# Altium PCB board_32.PcbDoc
Units mil, origin at the board's own origin, x right, y up, seen from the top; angles counter-clockwise.
Board outline 3248.03 x 3149.61 mil, 2 copper layers (Top Layer, Bottom Layer); 42 components, 39 nets, 152 pads, 6 vias.
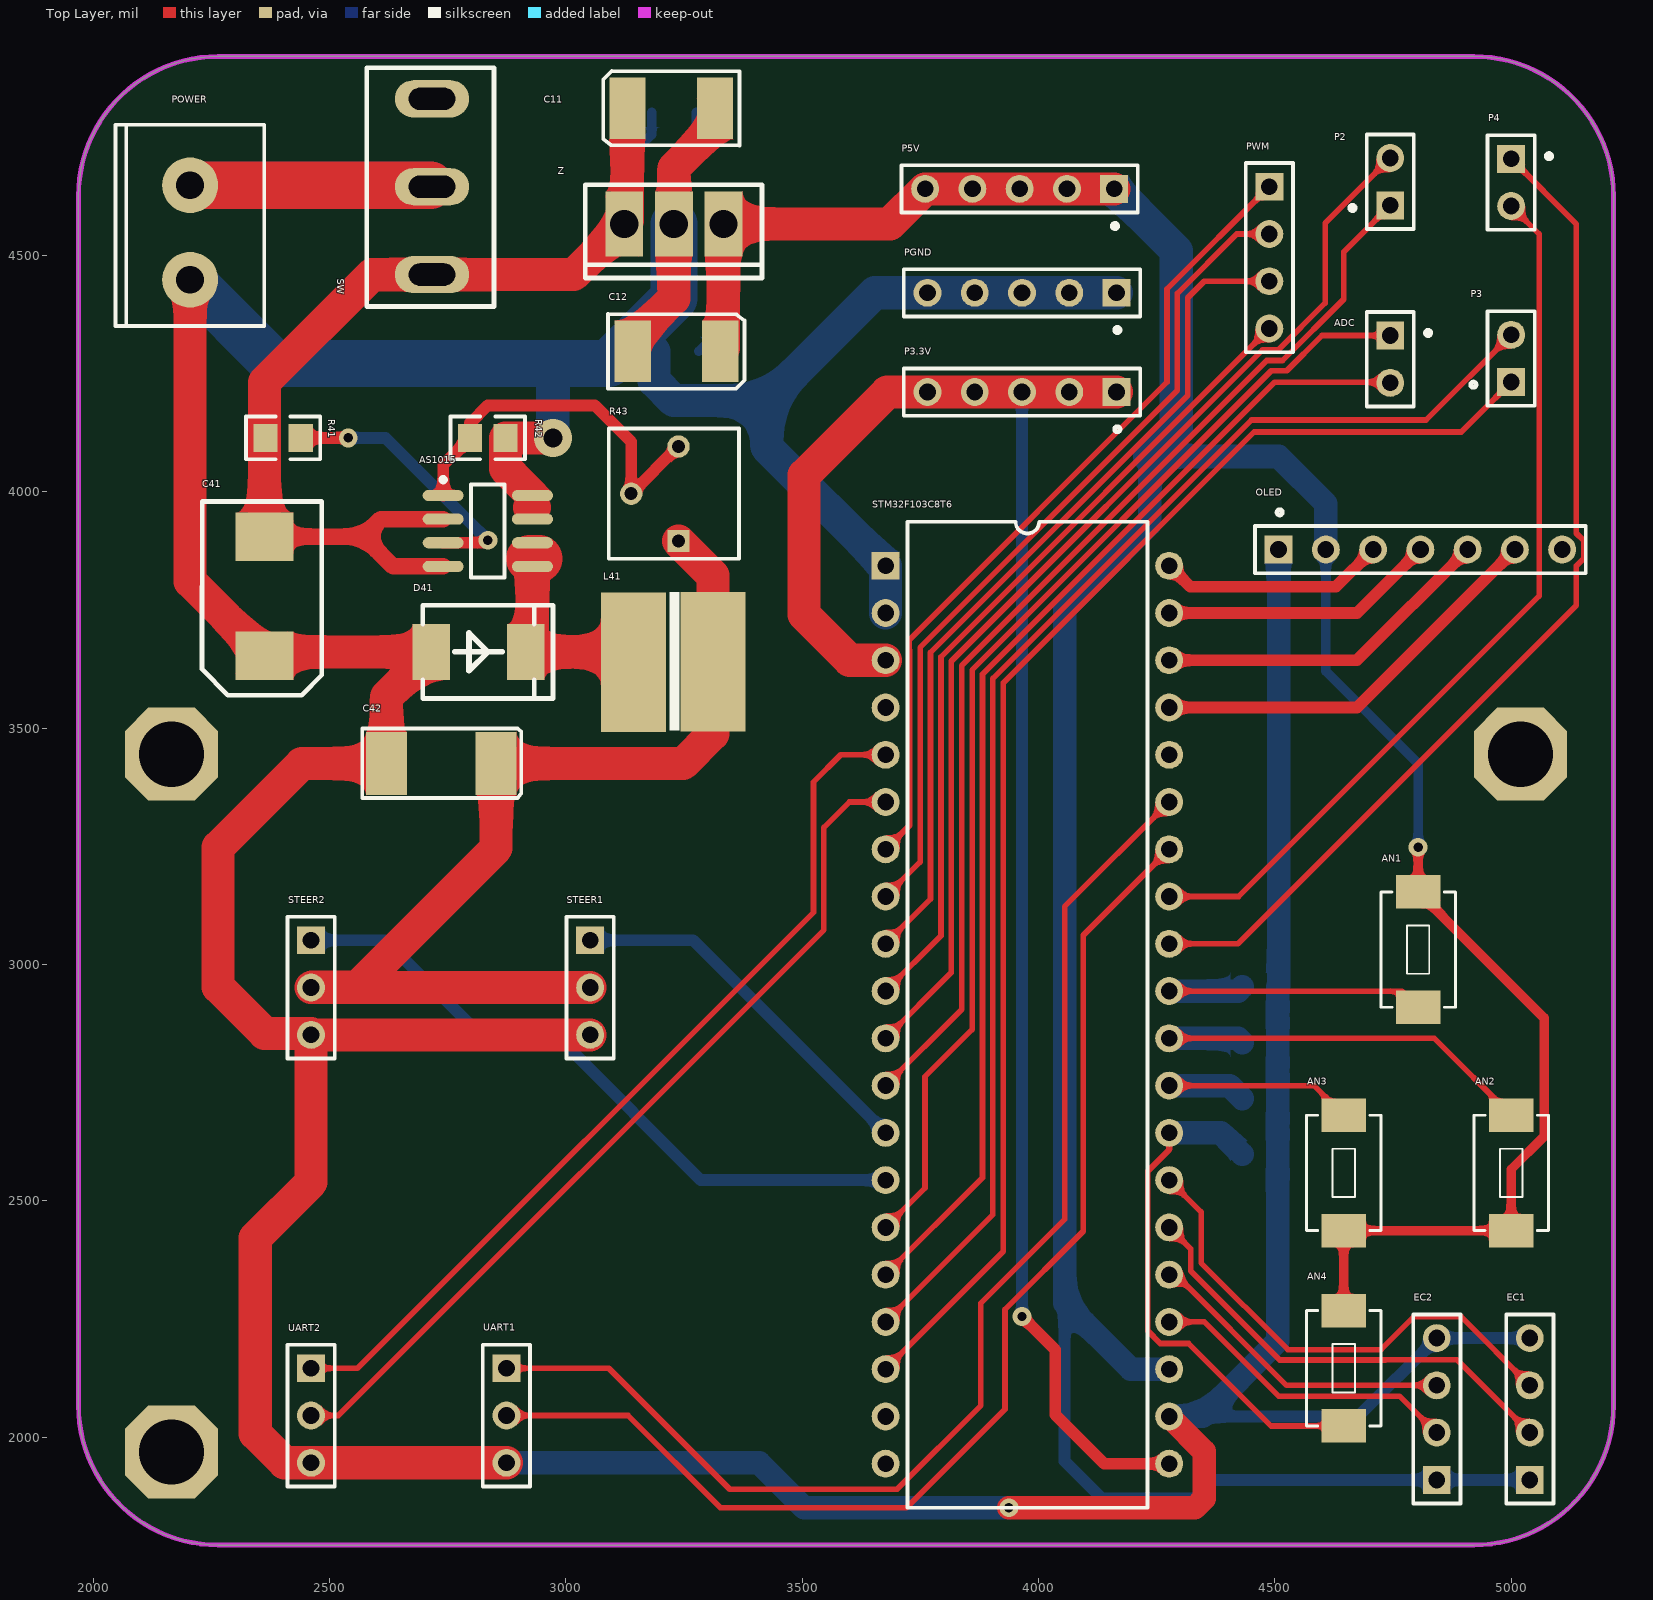
[diagram p0: Top Layer view]
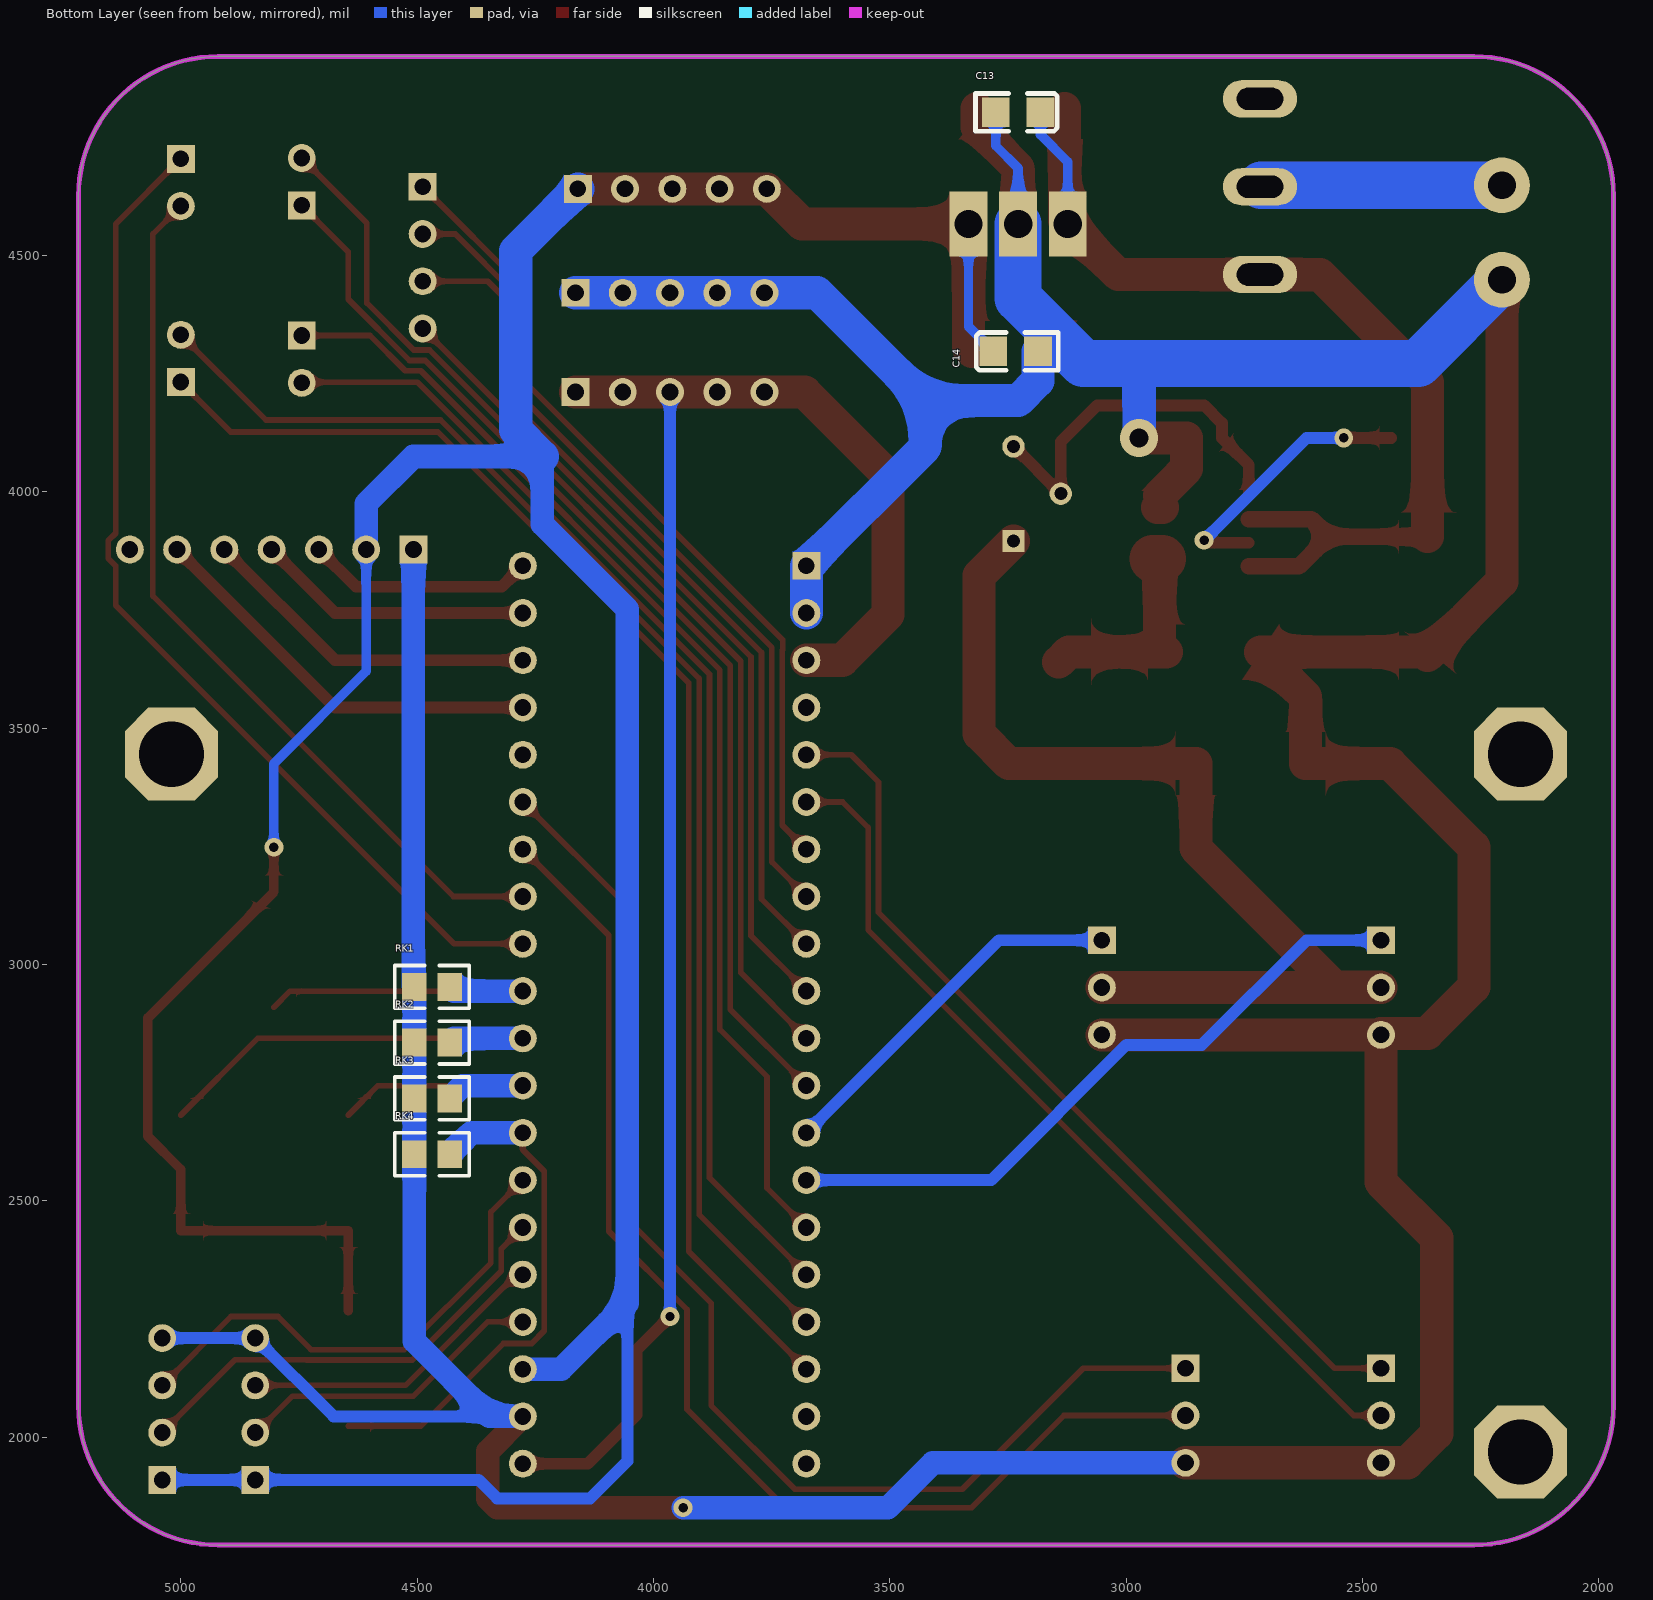
[diagram p1: Bottom Layer view, seen from below]
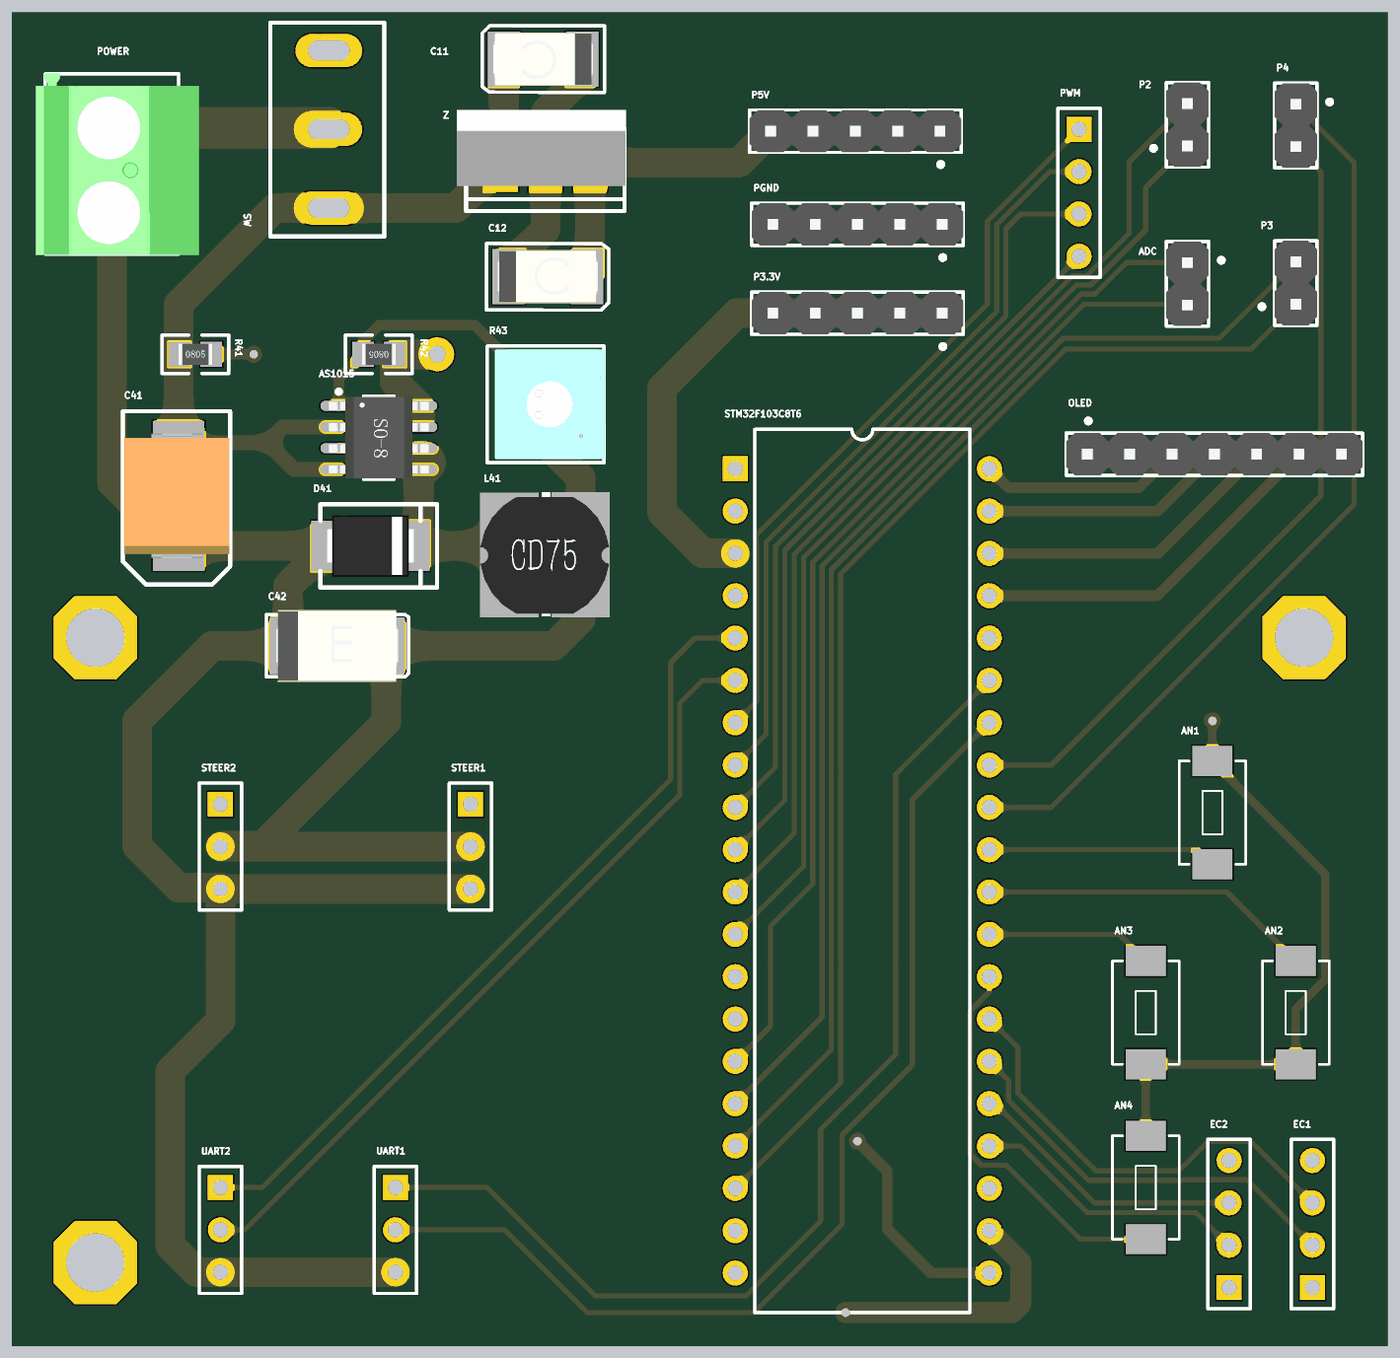
[diagram p2: 3D render of the assembled board from above, using the file's embedded part models]
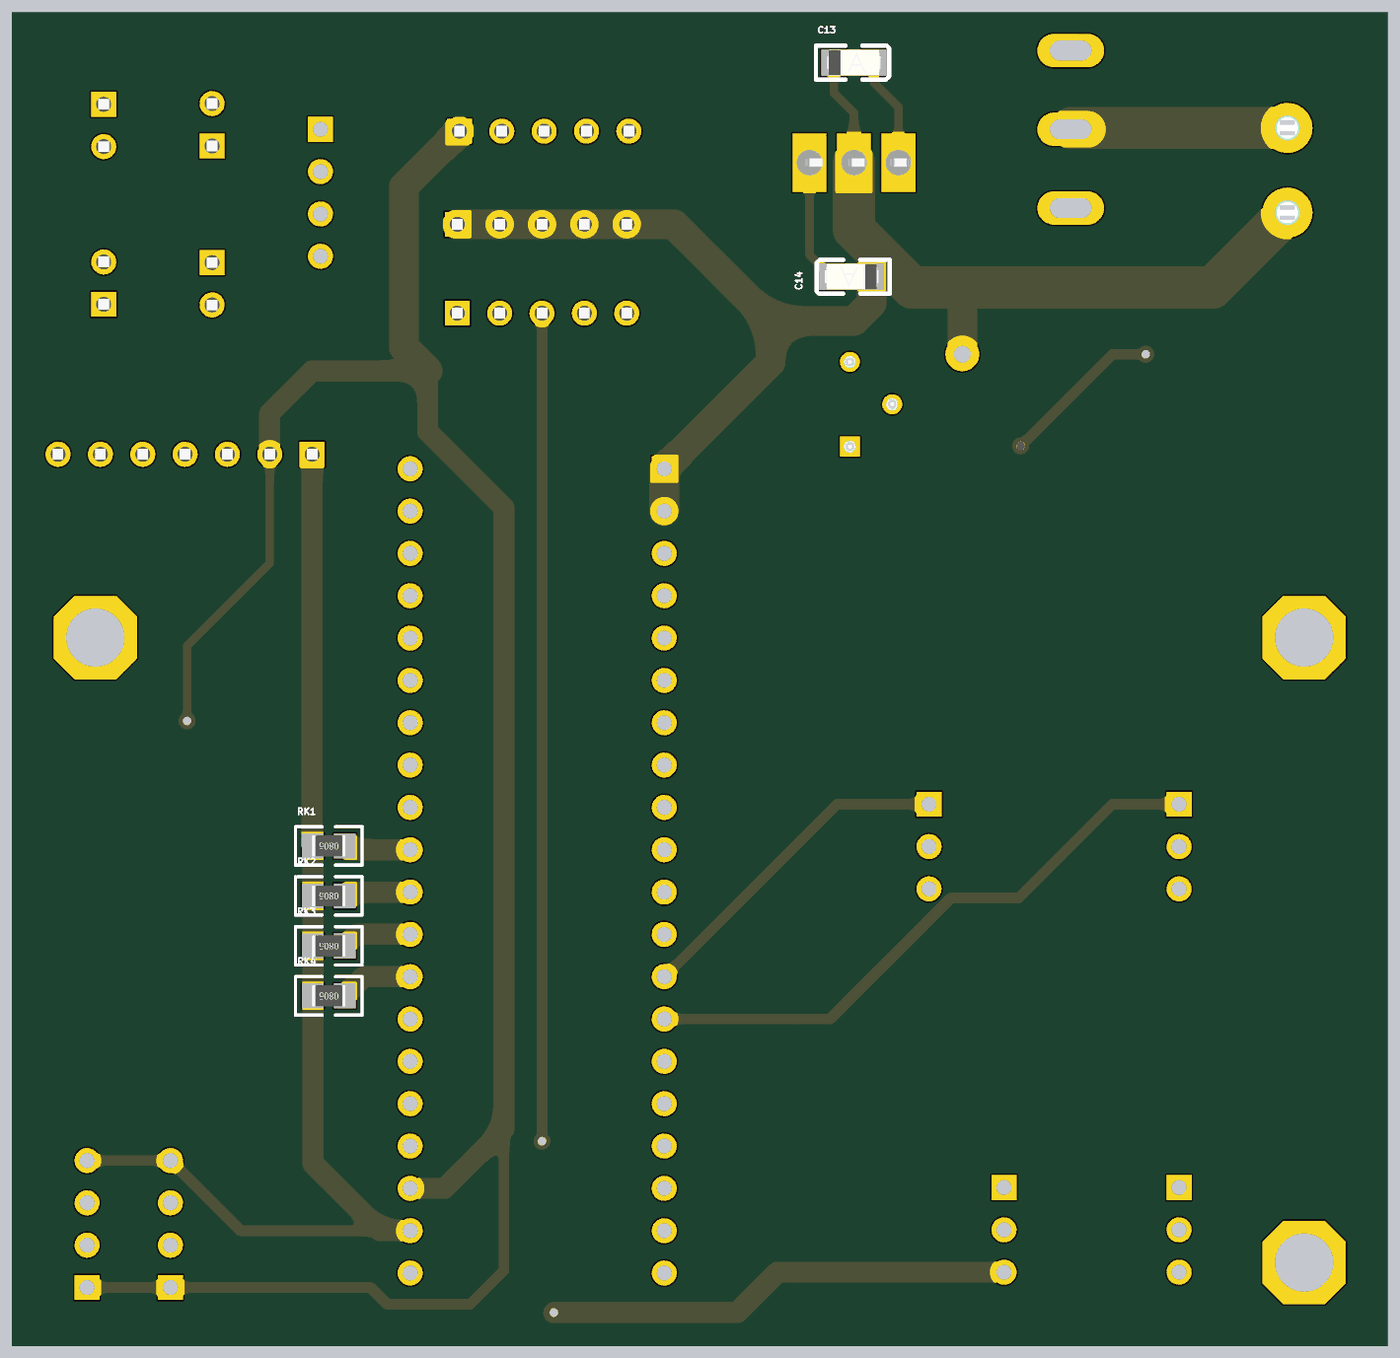
[diagram p3: 3D render of the assembled board from below, using the file's embedded part models]

## Layer stack, top to bottom
Top Solder: solder mask 0.4, Solder Resist, Dk 3.5
Top Layer: signal copper 1.4
Dielectric 1: dielectric 12.6, FR-4, Dk 4.8
Bottom Layer: signal copper 1.4
Bottom Solder: solder mask 0.4, Solder Resist, Dk 3.5

## Board outline
1968.5,2066.93 1968.5,4625.98 cw(c2263.78,4625.98) 2263.78,4921.26 4921.26,4921.26 cw(c4921.26,4625.98) 5216.54,4625.98 5216.54,2066.93 cw(c4921.26,2066.93) 4921.26,1771.65 2263.78,1771.65 cw(c2263.78,2066.93)

## Design rules (kind name [scope] priority, off if disabled: settings)
Clearance [All] p1: gap=8
Height [All] p1 off: minheight=0 maxheight=1000 prefheight=500
HoleSize [All] p1: absolutevalues=TRUE maxlimit=300 minlimit=1 maxpercent=80.000 minpercent=20.000
PolygonConnect [All] p1: connectstyle=Relief reliefconductorwidth=10 reliefentries=4 polygonreliefangle="90 Angle" airgapwidth=10
RoutingVias [All] p1: holewidth=28 width=50 viastyle="Through Hole" minholewidth=15 minwidth=30 maxholewidth=40 maxwidth=80
SilkToSilkClearance [All] p1 off: silktosilkclearance=10
SilkToSolderMaskClearance [IsPad] p1 off: minsilkscreentomaskgap=10 clearancetoexposedcopper=TRUE
SolderMaskExpansion [All] p1: expansion=4
Width [All] p1: maxlimit=200 minlimit=10 preferedwidth=12
26 further rules are at their usual default settings.

## Classes and differential pairs
component class board_32: ADC AN1 AN2 AN3 AN4 AS1015 C11 C12 C13 C14 C41 C42 D41 EC1 EC2 L41 OLED P2 P3 P3.3V P4 P5V PGND POWER PWM R41 R42 R43 RK1 RK2 RK3 RK4 STEER1 STEER2 STM32F103C8T6 SW UART1 UART2 Z

## Components (designator, comment, footprint, x,y, rotation, side; value= is the part's Value field where it differs from the comment)
ADC "Header 2" HDR1X2 4744.09,4330.71 r270 top
AN1 "Button" SMT4*6.2*4 4803.15,3031.5 r90 top
AN2 "Button" SMT4*6.2*4 5000,2559.06 r270 top
AN3 "Button" SMT4*6.2*4 4645.67,2559.06 r270 top
AN4 "Button" SMT4*6.2*4 4645.67,2145.67 r90 top
AS1015 "AS1015" SOP-8N 2834.65,3917.32 r0 top locked
C11 "Cap Tan C" TAN-C-6032 3222.72,4811.46 r180 top locked
C12 "Cap Tan C" TAN-C-6032 3233.7,4297.4 r0 top locked
C13 "Cap Tan A" TAN-A-3216 3228.35,4803.15 r180 bottom locked
C14 "Cap Tan A" TAN-A-3216 3233.7,4297.4 r0 bottom locked
C41 "Cap Tan E" C7361 2362.2,3779.53 r90 top locked
C42 "Cap Tan E" TAN-E-7361 2736.22,3425.2 r0 top locked
D41 "1N5824" SMB 2814.96,3661.42 r0 top locked
EC1 "Header 4" HDR1X4 5039.37,1909.45 r90 top
EC2 "Header 4" HDR1X4 4842.52,1909.45 r90 top
L41 "Inductor" CD75NP 3228.35,3641.73 r0 top locked
OLED "Header 7" HDR1X7 4507.87,3877.95 r0 top
P2 "Header 2" HDR1X2 4744.09,4606.3 r90 top
P3 "Header 2" HDR1X2 5000,4232.28 r90 top
P3.3V "Header 5" HDR1X5 4164.96,4211.26 r180 top locked
P4 "Header 2" HDR1X2 5000,4704.72 r270 top
P5V "Header 5" HDR1X5 4159.96,4641.26 r180 top locked
PGND "Header 5" HDR1X5 4164.96,4421.26 r180 top locked
POWER "Header 2" 2PIN-5.08A 2204.72,4448.82 r90 top locked
PWM "Header 4" HDR1X4 4488.19,4645.67 r270 top
R41 "Resistor Chip 0805" R0805 2401.57,4114.17 r0 top locked
R42 "Resistor Chip 0805" R0805 2834.65,4114.17 r180 top locked
R43 "RPot" VR_B1 3248.03,3996.06 r90 top locked
RK1 "Resistor Chip 0805" R0805 4468.5,2952.76 r0 bottom
RK2 "Resistor Chip 0805" R0805 4468.5,2834.65 r0 bottom
RK3 "Resistor Chip 0805" R0805 4468.5,2716.54 r0 bottom
RK4 "Resistor Chip 0805" R0805 4468.5,2598.43 r0 bottom
STEER1 "Header 3" HDR1X3 3051.18,3051.18 r270 top locked
STEER2 "Header 3" HDR1X3 2460.63,3051.18 r270 top locked
STM32F103C8T6 "stm32c8t6mini" DIP-40 3976.38,2893.7 r270 top
SW "SW" SW-TO3 2716.54,4645.67 r0 top locked
UART1 "Header 3" HDR1X3 2874.02,2145.67 r270 top
UART2 "Header 3" HDR1X3 2460.63,2145.67 r270 top
Z "LM2940" TO-220E 3228.35,4566.93 r180 top locked
? "Comment" "Screw hexagon 3mm" 2165.35,3444.88 r0 top
? "Comment" "Screw hexagon 3mm" 5019.69,3444.88 r0 top
? "Comment" "Screw hexagon 3mm" 2165.35,1968.5 r0 top

## Footprints (in the part's own frame and the unit in brackets; to place one, negate y for a bottom-side part, rotate by r counter-clockwise, add the part's x,y. Pads: shape width x height; smd on the part's side, far side on the other; paste and mask are expansions set on the pad)
2PIN-5.08A [mm]
  round 3 hole 1.5: 1(0,0) 2(5.08,0)
  silkscreen extent -2.49,-3.99 8.33,4.01, body extent -2.54,-5.2 8.36,4.6, height 14.2
C7361 [mm] "D型"
  rect 2.6x3.1 smd: 1(-3.202,0.007) 2(3.198,0.007)
  silkscreen extent -5.33,-3.07 5.08,3.36, body extent -3.75,-3.05 3.75,3.25, height 3.45
CD75NP [mm]
  rect 3.5x7.5 smd mask+0: 1(-2.174,-0.051) 2(2.101,-0.028)
  silkscreen extent -0.23,-3.72 0.29,3.73, body extent -3.91,-3.57 3.83,3.43, height 5
DIP-40 [mm] "51单片机"
  rect 1.5x1.5 hole 0.9: 1(-24.13,-7.62)
  round 1.5 hole 0.9: 2(-21.59,-7.62) 3(-19.05,-7.62) 4(-16.51,-7.62) 5(-13.97,-7.62) 6(-11.43,-7.62) 7(-8.89,-7.62) 8(-6.35,-7.62) 9(-3.81,-7.62) 10(-1.27,-7.62) 11(1.27,-7.62) 12(3.81,-7.62) 13(6.35,-7.62) 14(8.89,-7.62) 15(11.43,-7.62) 16(13.97,-7.62) 17(16.51,-7.62) 18(19.05,-7.62) 19(21.59,-7.62) 20(24.13,-7.62) 21(24.13,7.62) 22(21.59,7.62) 23(19.05,7.62) 24(16.51,7.62) 25(13.97,7.62) 26(11.43,7.62) 27(8.89,7.62) 28(6.35,7.62) 29(3.81,7.62) 30(1.27,7.62) 31(-1.27,7.62) 32(-3.81,7.62) 33(-6.35,7.62) 34(-8.89,7.62) 35(-11.43,7.62) 36(-13.97,7.62) 37(-16.51,7.62) 38(-19.05,7.62) 39(-21.59,7.62) 40(-24.13,7.62)
  silkscreen extent -26.5,-6.45 26.5,6.45
HDR1X2 [mm] "Connector; Header; 2 Position"
  rect 1.5x1.5 hole 0.9: 1(0,0)
  round 1.5 hole 0.9: 2(2.54,0)
  silkscreen extent -1.27,-1.27 3.81,2.17, body extent -1.27,-1.27 3.81,1.27, height 8.54
HDR1X3 [mm] "Connector; Header; 3 Position"
  rect 1.5x1.5 hole 0.9: 1(0,0)
  round 1.5 hole 0.9: 2(2.54,0) 3(5.08,0)
  silkscreen extent -1.27,-1.27 6.35,1.27
HDR1X4 [mm] "Connector; Header; 4 Position"
  rect 1.5x1.5 hole 0.9: 1(0,0)
  round 1.5 hole 0.9: 2(2.54,0) 3(5.08,0) 4(7.62,0)
  silkscreen extent -1.27,-1.27 8.89,1.27
HDR1X5 [mm] "Connector; Header; 5 Position"
  rect 1.5x1.5 hole 0.9: 1(0,0)
  round 1.5 hole 0.9: 2(2.54,0) 3(5.08,0) 4(7.62,0) 5(10.16,0)
  silkscreen extent -1.27,-1.27 11.43,2.14, body extent -1.27,-1.27 11.43,1.27, height 8.54
HDR1X7 [mm] "Connector; Header; 7 Position"
  rect 1.5x1.5 hole 0.9: 1(0,0)
  round 1.5 hole 0.9: 2(2.54,0) 3(5.08,0) 4(7.62,0) 5(10.16,0) 6(12.7,0) 7(15.24,0)
  silkscreen extent -1.27,-1.27 16.51,2.14, body extent -1.27,-1.27 16.51,1.27, height 8.54
R0805 [mm]
  rect 1.3x1.5 smd: 1(-0.95,0) 2(0.95,0)
  silkscreen extent -2,-1.15 2,1.15, body extent -1,-0.63 1,0.63, height 0.55
"Screw hexagon 3mm" [mm] "screw hole"
  oct 5x5 hole 3.5: 1(0,0)
SMB [mm]
  rect 2x3 smd: 1(-2.54,0) 2(2.54,0)
  silkscreen extent -3,-2.5 4,2.5, body extent -2.65,-1.85 2.65,1.85, height 2.2
SMT4*6.2*4 [mm]
  rect 1.8x2.4 smd: 1(-3.1,0) 2(3.1,0)
  silkscreen extent -3.1,-2 3.1,2, body extent -3.05,-1.95 3.05,1.75, height 2.5
SOP-8N [mm] "SOIC, 8-Leads, Body 4.9x3.9mm, Pitch 1.27mm, IPC Medium Density"
  oval 2.2x0.6 smd: 1(-2.4,1.905) 2(-2.4,0.635) 3(-2.4,-0.635) 4(-2.4,-1.905) 5(2.4,-1.905) 6(2.4,-0.635) 7(2.4,0.635) 8(2.4,1.905)
  silkscreen extent -2.52,-2.5 0.9,2.88, body extent -3,-2.45 3,2.45, height 1.7
SW-TO3 [mm]
  oval 4x2 hole 1.2 slot 2.5 at 0 deg: 1(0,-4.724) 2(0,0) 3(0,4.724)
  silkscreen extent -3.5,-6.43 3.33,6.39, body extent -3.43,-6.36 3.43,6.35, height 28.55
TAN-A-3216 [mm]
  rect 1.5x1.6 smd: 1(-1.2,0) 2(1.2,0)
  silkscreen extent -2.29,-1.02 2.11,1.02, body extent -1.6,-0.8 1.6,0.8, height 1.6
TAN-C-6032 [mm]
  rect 1.95x3.3 smd: 1(-2.35,0) 2(2.35,0)
  silkscreen extent -3.68,-2.01 3.66,2, body extent -3,-1.6 3,1.6, height 2.6
TAN-E-7361 [mm]
  rect 2.2x3.4 smd: 1(-2.95,0) 2(2.95,0)
  silkscreen extent -4.24,-1.85 4.29,1.88, body extent -3.65,-2.15 3.65,2.15, height 4.1
TO-220E [mil]
  rect 80x138 hole 60: 1(105,0) 2(0,0) 3(-105,0)
  silkscreen extent -186,-83 188,114, body extent -190,-125 210,55, height 730
VR_B1 [mm] "Potentiometer; 3 Leads"
  rect 1.2x1.2 hole 0.7: 1(-2.54,0.254)
  round 1.2 hole 0.7: 2(0,2.794) 3(2.54,0.254)
  silkscreen extent -3.5,-3 3.5,4, body extent -3.3,-3.05 3.3,3.55, height 4.4

## Part data
ADC P2 P3 P4 POWER: "Header, 2-Pin"
C11 C12 C13 C14 C41 C42: "Polarized Capacitor (Radial)"
D41: library part 1N4007, "1.0 Ampere General Purpose Rectifier"
EC1 EC2 PWM: "Header, 4-Pin"
OLED: "Header, 7-Pin"
P3.3V P5V PGND: "Header, 5-Pin"
R41 R42 RK1 RK2 RK3 RK4: "Resistor"
R43: "精密可调电阻"
STEER1 STEER2 UART1 UART2: "Header, 3-Pin"
SW: library part 开关三脚大电流
Z: "SOT-223"

## Via types
v1: diameter 40, hole 20, Top Layer to Bottom Layer, tented both sides, 5 vias
v2: diameter 80, hole 40, Top Layer to Bottom Layer, 1 vias

## Nets (pads, with @x,y where several pads share a name; then routed paths per layer and width w, separated by ;. In a path a pad name is that pad's centre, name@x,y a point inside that pad or via, vN(x,y) a via of type N, cw(c..) or ccw(c..) an arc to the next point about the centre after c; other vN are vias at no path point)
3.3V: P3.3V.1 P3.3V.2 P3.3V.3 P3.3V.4 P3.3V.5 STM32F103C8T6.3 STM32F103C8T6.21 | length 3718.6
  Top Layer w25: v1(3964.96,2255.12) 4035.43,2184.65 4035.43,2047.24 4138.98,1943.7 STM32F103C8T6.21
  Top Layer w70: STM32F103C8T6.3 3600.39,3643.7 3503.94,3740.16 3503.94,4035.43 3679.76,4211.26 P3.3V.5 P3.3V.4 P3.3V.3 P3.3V.2 P3.3V.1
  Bottom Layer w25: v1(3964.96,2255.12) P3.3V.3
5V: AN1.2 AN2.2 AN3.2 AN4.2 C12.2 C14.2 EC1.1 EC2.1 OLED.2 P5V.1 P5V.2 P5V.3 P5V.4 P5V.5 STM32F103C8T6.23 Z.3 | length 8274.1
  Top Layer w20: AN4.2 AN3.2 AN2.2 5000,2566.61 5069.74,2636.35 5069.74,2886.95 AN1.2 v1(4803.15,3248.03)
  Top Layer w70: C12.2 3333.35,4304.53 Z.3 3685.63,4566.93 P5V.5 P5V.4 P5V.3 P5V.2 P5V.1
  Bottom Layer w20: C14.2 3333.35,4349.8 Z.3 ; OLED.2 4607.87,3620.47 4803.15,3425.2 v1(4803.15,3248.03)
  Bottom Layer w25: 4055.12,2283.46 4055.12,1948.82 4133.86,1870.08 4330.71,1870.08 4370.08,1909.45 EC2.1 EC1.1
  Bottom Layer w50: STM32F103C8T6.23 4194.88,2143.7 4055.12,2283.46 4055.12,3751.5 4234.96,3931.34 4234.96,4074.8 4507.87,4074.8 4607.87,3974.8 OLED.2
  Bottom Layer w70: P5V.1 4291.34,4509.88 4291.34,4131.18 4234.96,4074.8
6V: C42.2 L41.2 R43.1 STEER1.2 STEER2.2 | length 2206.4
  Top Layer w70: STEER1.2 STEER2.2 2462.2,2952.76 2559.06,2952.76 2852.36,3246.06 C42.2 3248.03,3425.2 3311.05,3488.21 L41.2 3311.05,3823.05 R43.1
A4: P2.1 STM32F103C8T6.12 | length 2324.4
  Top Layer w12: STM32F103C8T6.12 3837.38,2904.7 3837.38,3632.63 4482.89,4278.14 4516.16,4278.14 4645.67,4407.65 4645.67,4507.87 P2.1
A5: P2.2 STM32F103C8T6.11 | length 2324.4
  Top Layer w12: STM32F103C8T6.11 3815.38,2982.7 3815.38,3641.75 4473.77,4300.14 4507.05,4300.14 4606.3,4399.39 4606.3,4568.5 P2.2
A11: P4.2 STM32F103C8T6.33 | length 1895.7
  Top Layer w12: STM32F103C8T6.33 4423.23,3143.7 5059.06,3779.53 5059.06,4545.67 P4.2
A12: P4.1 STM32F103C8T6.32 | length 2172.9
  Top Layer w12: STM32F103C8T6.32 4421.65,3043.7 5137.8,3759.84 5137.8,3843.49 5153.4,3859.09 5153.4,3896.81 5137.8,3912.42 5137.8,4566.93 P4.1
ADC1: ADC.1 STM32F103C8T6.15 | length 2433.1
  Top Layer w12: STM32F103C8T6.15 3759.84,2527.17 3759.84,2762.78 3859.38,2862.32 3859.38,3623.16 4492.36,4256.14 4525.27,4256.14 4599.84,4330.71 ADC.1
ADC2: ADC.2 STM32F103C8T6.16 | length 2474.7
  Top Layer w12: STM32F103C8T6.16 3881.38,2548.7 3881.38,3614.04 4499.62,4232.28 4742.52,4232.28 ADC.2
C14: P3.1 STM32F103C8T6.18 | length 2893.5
  Top Layer w12: STM32F103C8T6.18 3925.38,2392.7 3925.38,3595.82 4456.12,4126.56 4894.28,4126.56 P3.1
C15: P3.2 STM32F103C8T6.17 | length 2853.2
  Top Layer w12: STM32F103C8T6.17 3903.38,2470.7 3903.38,3604.93 4450.4,4151.96 4819.67,4151.96 P3.2
D0: OLED.3 STM32F103C8T6.40 | length 482.5
  Top Layer w25: STM32F103C8T6.40 4320.87,3799.21 4629.13,3799.21 OLED.3
D1: STEER1.1 STM32F103C8T6.13 | length 794
  Bottom Layer w25: STEER1.1 3268.9,3051.18 STM32F103C8T6.13
D2: STEER2.1 STM32F103C8T6.14 | length 1426
  Bottom Layer w25: STEER2.1 2618.11,3051.18 2839.66,2829.63 2999.15,2829.63 3285.08,2543.7 STM32F103C8T6.14
DC: OLED.6 STM32F103C8T6.37 | length 869.9
  Top Layer w25: STM32F103C8T6.37 4673.62,3543.7 OLED.6
DI: OLED.4 STM32F103C8T6.39 | length 587.1
  Top Layer w25: STM32F103C8T6.39 4673.62,3743.7 OLED.4
ECA1: EC1.3 STM32F103C8T6.27 | length 1063.8
  Top Layer w12: STM32F103C8T6.27 4343.91,2476.17 4343.91,2368.69 4527.56,2185.04 4724.41,2185.04 4794.35,2254.98 4893.84,2254.98 EC1.3
ECA2: EC2.3 STM32F103C8T6.25 | length 663.2
  Top Layer w12: STM32F103C8T6.25 4290.16,2343.7 4524.41,2109.45 EC2.3
ECB1: EC1.2 STM32F103C8T6.26 | length 971
  Top Layer w12: STM32F103C8T6.26 4321.91,2398.17 4321.91,2351.32 4510.19,2163.04 4733.52,2163.04 4734.4,2163.92 4884.9,2163.92 EC1.2
ECB2: EC2.2 STM32F103C8T6.24 | length 663.2
  Top Layer w12: STM32F103C8T6.24 4350.79,2243.7 4507.87,2086.61 4763.78,2086.61 4840.94,2009.45 EC2.2
GND: AS1015.7 AS1015.8 C11.1 C12.1 C13.1 C14.1 C41.1 C42.1 D41.1 EC1.4 EC2.4 OLED.1 PGND.1 PGND.2 PGND.3 PGND.4 PGND.5 POWER.1 R42.1 RK1.2 RK2.2 RK3.2 RK4.2 STEER1.3 STEER2.3 STM32F103C8T6.1 STM32F103C8T6.2 STM32F103C8T6.22 UART1.3 UART2.3 Z.2 | length 13232
  Top Layer w50: v1(3937.01,1850.39) 4330.71,1850.39 4350.39,1870.08 4350.39,1969.69 STM32F103C8T6.22
  Top Layer w70: POWER.1 2204.72,3810.67 C41.1 2369.88,3661.42 D41.1 2620.08,3566.54 C42.1 2440.94,3425.2 2263.78,3248.03 2263.78,2952.76 2362.2,2854.33 2460.63,2854.33 STEER2.3 ; UART1.3 UART2.3 2404.72,1945.67 2342.52,2007.87 2342.52,2421.26 2460.63,2539.37 STEER2.3 ; 2923.23,3966.54 2933.07,3966.54 ; AS1015.8 2872.05,4049.41 R42.1 v2(2972.44,4114.17) ; STEER1.3 STEER2.3 ; C12.1 3141.18,4322.28 3228.35,4409.45 Z.2 3228.35,4685.04 3315.24,4771.93 C11.1
  Bottom Layer w20: Z.2 3228.35,4685.04 3275.59,4732.28 C13.1
  Bottom Layer w25: 4346.85,2043.7 4676.77,2043.7 EC2.4 EC1.4
  Bottom Layer w50: UART1.3 3408.66,1945.67 3503.94,1850.39 v1(3937.01,1850.39) ; STM32F103C8T6.22 4346.85,2043.7 4505.91,2202.76 RK4.2 RK3.2 RK2.2 RK1.2 4507.87,2954.72 OLED.1
  Bottom Layer w70: v2(2972.44,4114.17) 2972.44,4271.65 ; C14.1 3186.46,4234.8 3228.35,4192.91 3425.2,4192.91 ; STM32F103C8T6.2 STM32F103C8T6.1 3425.2,4094.88 3425.2,4192.91 ; PGND.1 PGND.2 PGND.3 PGND.4 PGND.5 3653.54,4421.26 3425.2,4192.91
  Bottom Layer w100: POWER.1 2381.89,4271.65 2972.44,4271.65 3090.55,4271.65 3228.35,4409.45 Z.2
KEY1: AN1.1 RK1.1 STM32F103C8T6.31 | length 699.4
  Top Layer w12: STM32F103C8T6.31 4768.9,2943.7 AN1.1
  Bottom Layer w50: STM32F103C8T6.31 4422.05,2943.7 RK1.1
KEY2: AN2.1 RK2.1 STM32F103C8T6.30 | length 949.4
  Top Layer w12: STM32F103C8T6.30 4837.4,2843.7 AN2.1
  Bottom Layer w50: STM32F103C8T6.30 4422.05,2843.7 RK2.1
KEY3: AN3.1 RK3.1 STM32F103C8T6.29 | length 561.2
  Top Layer w12: STM32F103C8T6.29 4583.07,2743.7 AN3.1
  Bottom Layer w50: STM32F103C8T6.29 4403.94,2743.7 RK3.1
KEY4: AN4.1 RK4.1 STM32F103C8T6.28 | length 1109.4
  Top Layer w12: STM32F103C8T6.28 4276.38,2608.09 4230.85,2562.56 4230.85,2224.84 4257.52,2198.17 4317.57,2198.17 4492.13,2023.62 AN4.1
  Bottom Layer w50: STM32F103C8T6.28 4385.83,2643.7 RK4.1
NetAS1015_1: AS1015.1 R42.2 R43.2 R43.3 | length 816.6
  Top Layer w25: AS1015.1 2740.16,4057.09 R42.2 2797.24,4145.67 2834.65,4183.07 3061.02,4183.07 3138.03,4106.06 R43.2 R43.3
NetAS1015_3: AS1015.3 R41.2 | length 574.5
  Top Layer w25: R41.2 v1(2539.37,4114.17) ; AS1015.3 v1@2829.33,3892.32
  Bottom Layer w25: v1(2539.37,4114.17) 2618.11,4114.17 v1(2834.65,3897.64)
NetAS1015_5: AS1015.5 AS1015.6 D41.2 L41.1 | length 474.9
  Top Layer w70: 2929.13,3874.02 AS1015.5 2929.13,3675.59 D41.2 3121.03,3661.42 L41.1
  Top Layer w100: 2923.23,3858.27 2942.91,3858.27
NetPOWER_2: POWER.2 SW.2 | length 1021.8
  Top Layer w100: POWER.2 SW.2@2713.39,4648.82
  Bottom Layer w70: SW.2@2713.39,4648.82 SW.2
  Bottom Layer w100: POWER.2 SW.2@2713.39,4648.82
PWM1: PWM.1 STM32F103C8T6.7 | length 1739.2
  Top Layer w12: STM32F103C8T6.7 3727.38,3294.7 3727.38,3664.83 3726.27,3665.94 3726.27,3686.9 4271.65,4232.28 4271.65,4429.13 PWM.1
PWM2: PWM.2 STM32F103C8T6.8 | length 1778.6
  Top Layer w12: STM32F103C8T6.8 3749.38,3216.7 3749.38,3670.64 4293.65,4214.91 4293.65,4420.02 4419.3,4545.67 PWM.2
PWM3: PWM.3 STM32F103C8T6.9 | length 1818.9
  Top Layer w12: STM32F103C8T6.9 3771.38,3138.7 3771.38,3659.97 4315.65,4204.25 4315.65,4410.91 4350.41,4445.67 PWM.3
PWM4: PWM.4 STM32F103C8T6.10 | length 1738.2
  Top Layer w12: STM32F103C8T6.10 3793.38,3060.7 3793.38,3650.86 PWM.4
RST: OLED.5 STM32F103C8T6.38 | length 728.5
  Top Layer w25: STM32F103C8T6.38 4673.62,3643.7 OLED.5
RX1: STM32F103C8T6.34 UART1.2 | length 2550.9
  Top Layer w12: UART1.2 3131.5,2045.67 3326.77,1850.39 3720.47,1850.39 3928.96,2058.88 3928.96,2270.03 4094.49,2435.56 4094.49,3061.81 STM32F103C8T6.34
RX2: STM32F103C8T6.5 UART2.1 | length 1914.8
  Top Layer w12: UART2.1 2559.06,2145.67 3523.62,3110.24 3523.62,3385.83 3581.5,3443.7 STM32F103C8T6.5
TX1: STM32F103C8T6.35 UART1.1 | length 2625.1
  Top Layer w12: UART1.1 3090.55,2145.67 3346.46,1889.76 3700.79,1889.76 3877.95,2066.93 3877.95,2283.46 4055.12,2460.63 4055.12,3122.44 STM32F103C8T6.35
TX2: STM32F103C8T6.6 UART2.2 | length 1880.3
  Top Layer w12: UART2.2 2518.11,2045.67 3545.62,3073.18 3545.62,3289.72 3599.61,3343.7 STM32F103C8T6.6
VIN: AS1015.2 AS1015.4 C11.2 C13.2 C41.2 R41.1 SW.1 Z.1 | length 2323.1
  Top Layer w35: C41.2 2570.94,3905.43 ; AS1015.4 2634.06,3842.32 2570.94,3905.43 ; AS1015.2 2607.83,3942.32 2570.94,3905.43
  Top Layer w70: C41.2 2361.93,4232.01 2589.59,4459.67 SW.1 3016.09,4459.67 Z.1 3130.2,4573.78 C11.2
  Bottom Layer w20: Z.1 3123.35,4698.15 3181.1,4755.91 C13.2
pads on no net: ?.1 OLED.7 STM32F103C8T6.4 STM32F103C8T6.19 STM32F103C8T6.20 STM32F103C8T6.36 SW.3

## Keep-outs
Keep-Out Layer:
  the board outline again, w10